# EAGLE board SwerveCANConnector_v2 (EAGLE 9.7.0)
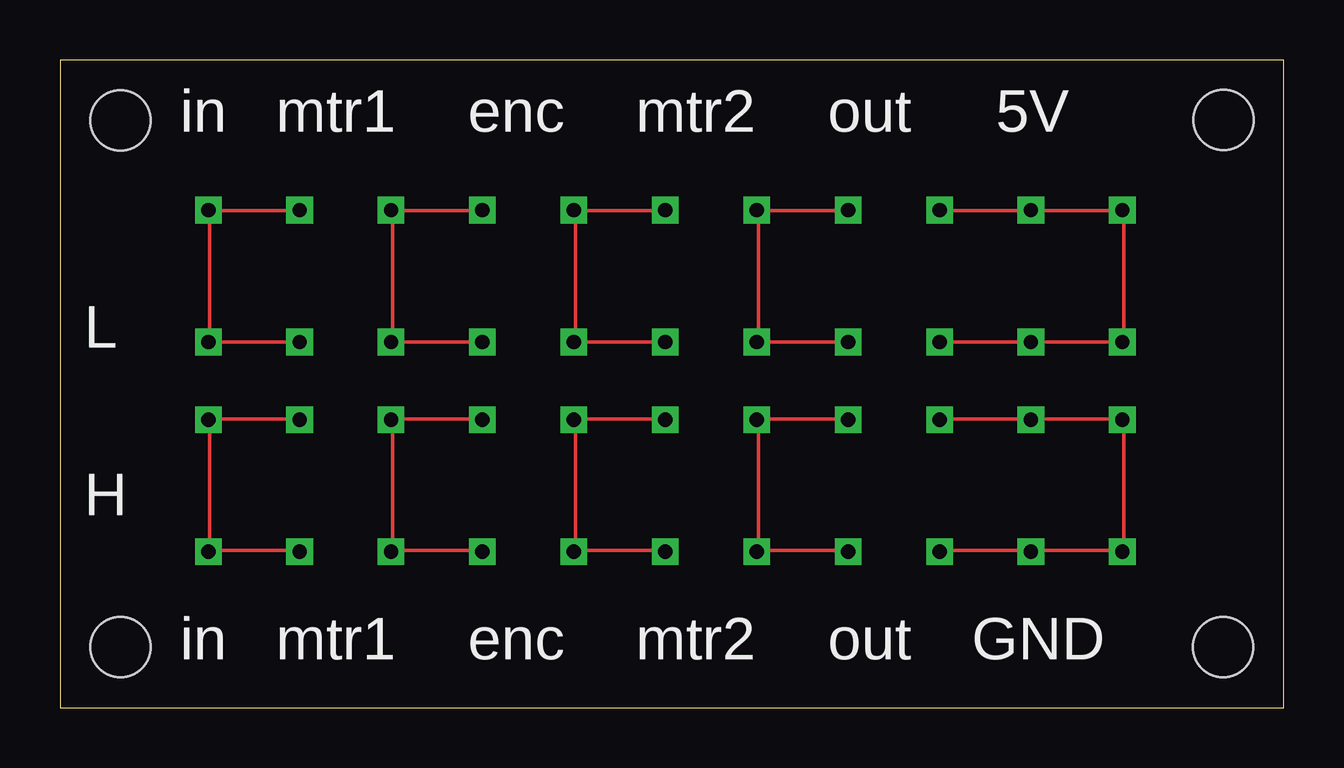
[diagram p0: board, top side]
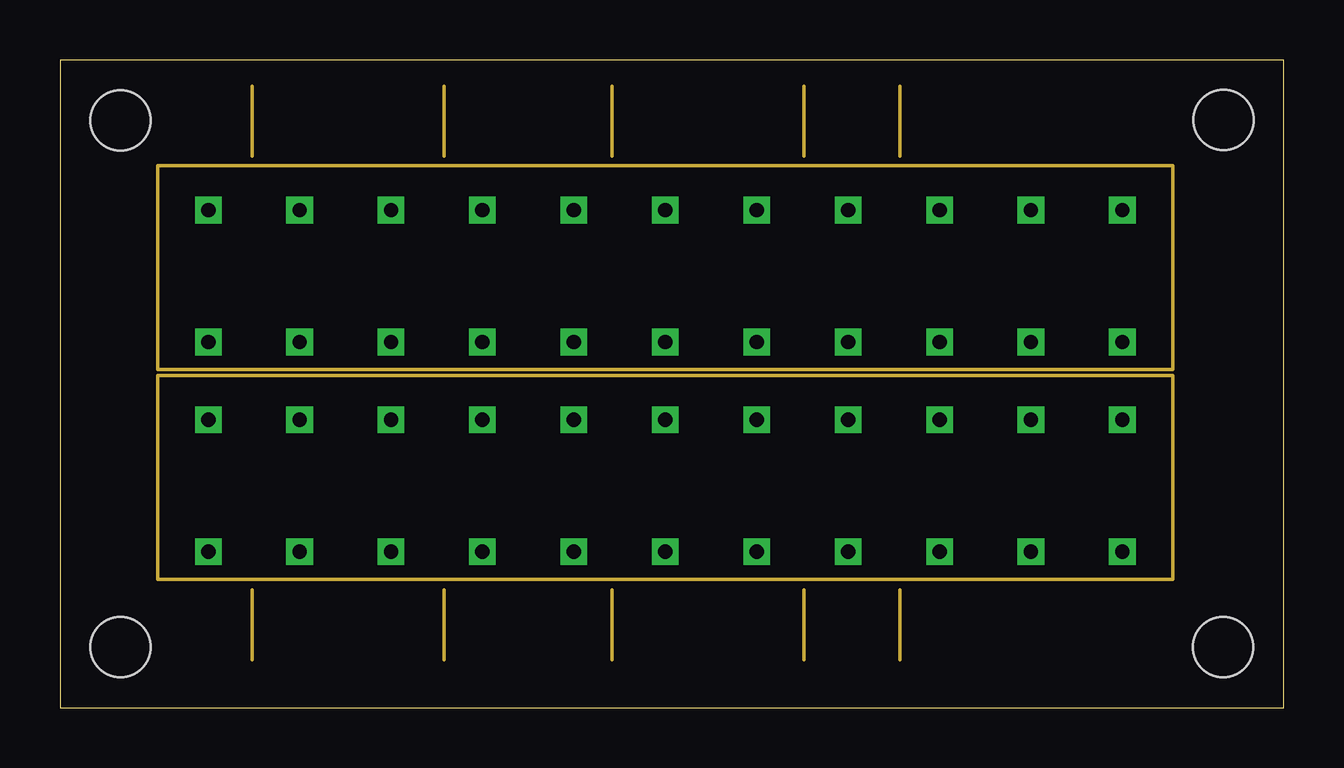
[diagram p1: board, inner layer Route2]

Size 51 x 27 mm. Coordinates in mm from the lower left corner, seen from the top.
Outline: 0,0 51,0 51,27 0,27 0,0
Copper layers (1*16): Top / Bottom
Stack-up Default Layer Stack: Top User Defined 0.035mm / Dielectric-1 User Defined 1.5mm / Bottom User Defined 0.035mm
Design rules "default": minimum track width 6mil, minimum drill 0.35mm, track to track 6mil, track to pad 6mil, pad to pad 6mil, via to via 6mil, smd to smd 6mil, copper to edge 40mil, drill to drill 6mil, minimum pad ring 10mil, minimum via ring 8mil, stop-mask expansion 4mil, vias tented up to drill 0mil, thermal gap 10mil
Holes 2.5 mm at 2.52,2.52 2.52,24.48 48.5,24.5 48.48,2.52

## Footprints (pad centres in the part's own frame; a part is rotated, then mirrored left to right if it is on the bottom)
WEIDM-1825890000 = drill 0.6 square: PIN1 0,0; PIN2 3.81,0; PIN3 7.62,0; PIN4 11.43,0; PIN5 15.24,0; PIN6 19.05,0; PIN7 22.86,0; PIN8 26.67,0; PIN9 30.48,0; PIN10 34.29,0; PIN11 38.1,0; PIN12 0,5.5; PIN13 3.81,5.5; PIN14 7.62,5.5; PIN15 11.43,5.5; PIN16 15.24,5.5; PIN17 19.05,5.5; PIN18 22.86,5.5; PIN19 26.67,5.5; PIN20 30.48,5.5; PIN21 34.29,5.5; PIN22 38.1,5.5

## Placement (x,y rotation side)
U$1  WEIDM-1825890000  [WEIDM-1825890000]  6.18,6.5 0 top
U$2  WEIDM-1825890000  [WEIDM-1825890000]  6.18,15.24 0 top

## Library data of the parts
U$1 U$2 = StealthEE

## Nets
N$1: U$1.PIN1 U$1.PIN2 U$1.PIN12 U$1.PIN13
N$2: U$1.PIN3 U$1.PIN4 U$1.PIN14 U$1.PIN15
N$3: U$1.PIN5 U$1.PIN6 U$1.PIN16 U$1.PIN17
N$4: U$1.PIN7 U$1.PIN8 U$1.PIN18 U$1.PIN19
N$5: U$1.PIN9 U$1.PIN10 U$1.PIN11 U$1.PIN20 U$1.PIN21 U$1.PIN22
N$6: U$2.PIN1 U$2.PIN2 U$2.PIN12 U$2.PIN13
N$7: U$2.PIN3 U$2.PIN4 U$2.PIN14 U$2.PIN15
N$8: U$2.PIN5 U$2.PIN6 U$2.PIN16 U$2.PIN17
N$9: U$2.PIN7 U$2.PIN8 U$2.PIN18 U$2.PIN19
N$10: U$2.PIN9 U$2.PIN10 U$2.PIN11 U$2.PIN20 U$2.PIN21 U$2.PIN22

## Tracks (layer width: path | path; a pad name or v marks a point on that pad's centre or on a via)
N$1
  Top 0.152: 6.25,6.55 9.91,6.55 U$1.PIN2 | U$1.PIN13 9.91,12.04 6.25,12.04 U$1.PIN12 6.25,11.89 6.25,6.55 | 6.25,6.55 U$1.PIN1
N$2
  Top 0.152: 13.87,6.55 17.53,6.55 U$1.PIN4 | U$1.PIN15 17.53,12.04 13.87,12.04 U$1.PIN14 13.87,11.89 13.87,6.55 | 13.87,6.55 U$1.PIN3
N$3
  Top 0.152: 21.49,6.55 25.15,6.55 U$1.PIN6 | U$1.PIN17 25.15,12.04 21.49,12.04 U$1.PIN16 21.49,11.89 21.49,6.55 | 21.49,6.55 U$1.PIN5
N$4
  Top 0.152: 29.11,6.55 32.77,6.55 U$1.PIN8 | U$1.PIN19 32.77,12.04 29.11,12.04 U$1.PIN18 29.11,11.89 29.11,6.55 | 29.11,6.55 U$1.PIN7
N$5
  Top 0.152: U$1.PIN9 36.73,6.55 40.39,6.55 U$1.PIN10 40.54,6.55 44.2,6.55 U$1.PIN11 44.35,6.55 44.35,11.89 U$1.PIN22 44.2,12.04 40.54,12.04 U$1.PIN21 40.39,12.04 36.73,12.04 U$1.PIN20
N$6
  Top 0.152: U$2.PIN2 6.25,15.24 | 6.25,20.73 9.91,20.73 U$2.PIN13 | 6.25,20.73 6.25,15.24 | 6.25,15.24 U$2.PIN1 | 6.25,20.73 U$2.PIN12
N$7
  Top 0.152: U$2.PIN4 13.87,15.24 | 13.87,20.73 17.53,20.73 U$2.PIN15 | 13.87,20.73 13.87,15.24 | 13.87,15.24 U$2.PIN3 | 13.87,20.73 U$2.PIN14
N$8
  Top 0.152: U$2.PIN6 21.49,15.24 | 21.49,20.73 25.15,20.73 U$2.PIN17 | 21.49,20.73 21.49,15.24 | 21.49,15.24 U$2.PIN5 | 21.49,20.73 U$2.PIN16
N$9
  Top 0.152: U$2.PIN8 29.11,15.24 | 29.11,20.73 32.77,20.73 U$2.PIN19 | 29.11,20.73 29.11,15.24 | 29.11,15.24 U$2.PIN7 | 29.11,20.73 U$2.PIN18
N$10
  Top 0.152: U$2.PIN9 U$2.PIN10 U$2.PIN11 44.35,15.24 44.35,20.73 U$2.PIN22 44.2,20.73 40.54,20.73 U$2.PIN21 40.39,20.73 36.73,20.73 U$2.PIN20
N$11
  Route2 0.152: 8,25.91 8,23
N$12
  Route2 0.152: 16,25.91 16,23
N$13
  Route2 0.152: 23,25.91 23,23
N$14
  Route2 0.152: 31,25.91 31,23
N$15
  Route2 0.152: 35,25.91 35,23
N$16
  Route2 0.152: 8,4.91 8,2
N$17
  Route2 0.152: 16,4.91 16,2
N$18
  Route2 0.152: 23,4.91 23,2
N$19
  Route2 0.152: 31,4.91 31,2
N$20
  Route2 0.152: 35,4.91 35,2

## Text on the board
tPlace: in | mtr1 | enc | mtr2 | out | 5V | L | H | in | mtr1 | enc | mtr2 | out | GND